# Altium PCB ISO-ASS[3]-R-RC1.PcbDoc
Units mm, origin at the board's own origin, x right, y up, seen from the top; angles counter-clockwise.
Board outline 300 x 88 mm, 2 copper layers (Top Layer, Bottom Layer); 123 components, 15 nets, 691 pads, 6 vias.
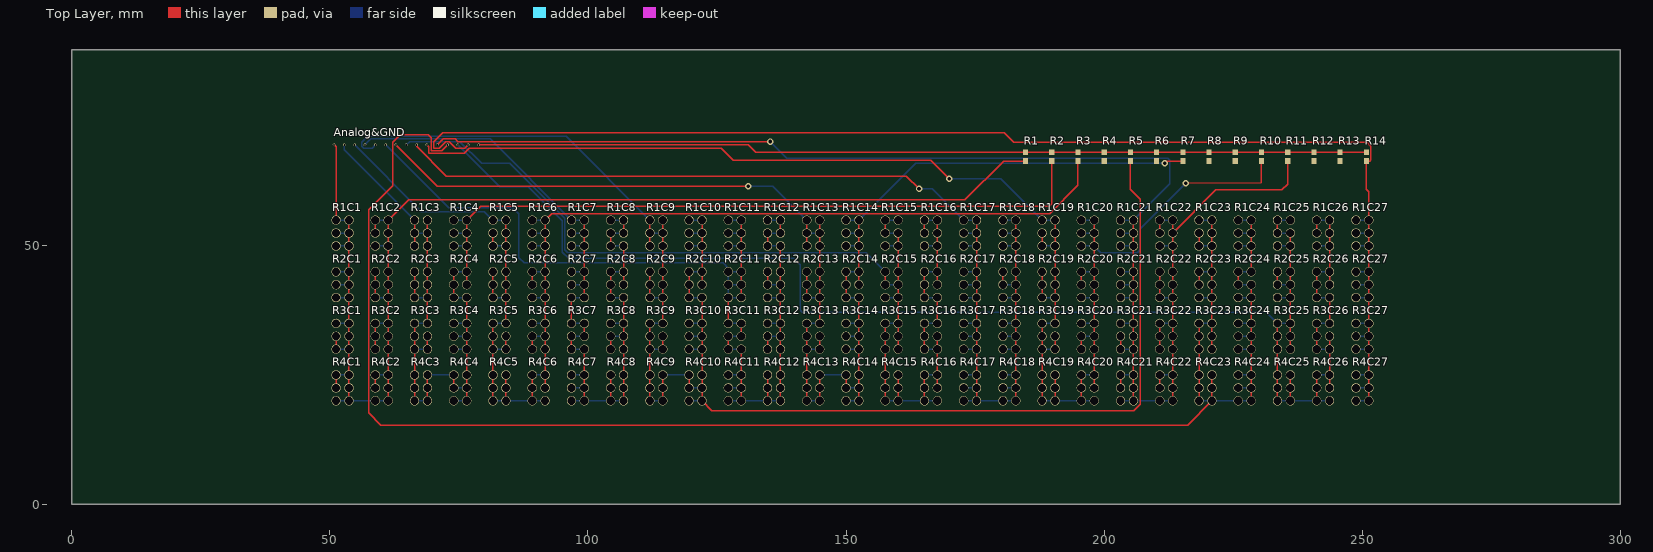
[diagram p0: Top Layer view]
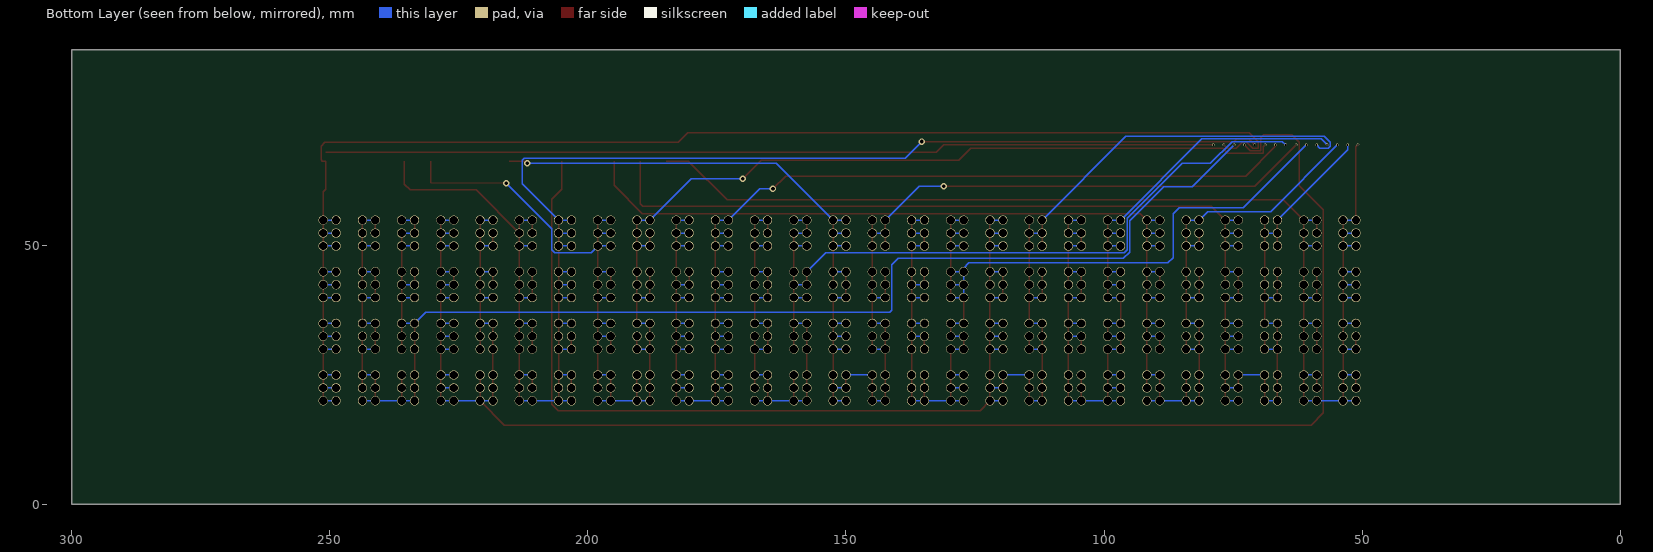
[diagram p1: Bottom Layer view, seen from below]

## Layer stack, top to bottom
Top Layer: signal copper 0.0356
Dielectric: core 0.32, FR-4, Dk 4.8
Bottom Layer: signal copper 0.0356

## Board outline
0,0 300,0 300,88 0,88 0,0

## Design rules (kind name [scope] priority, off if disabled: settings)
Clearance [All] p1: gap=0.254
PolygonConnect [All] p1: connectstyle=Relief reliefconductorwidth=0.254 reliefentries=4 polygonreliefangle="90 Angle"
RoutingVias [All] p1: holewidth=0.711 width=1.27 viastyle="Through Hole" minholewidth=0.711 minwidth=1.27 maxholewidth=0.711 maxwidth=1.27
SilkscreenOverComponentPads [All] p1: minsilkscreentomaskgap=0.254
SolderMaskExpansion [All] p1: expansion=0.102
TestPointUsage [All] p1: valid=0 allowmultiple=FALSE
Testpoint [All] p1: side=15 testpointundercomponent=TRUE minsize=1.016 maxsize=2.54 preferedsize=1.524 minholesize=0 maxholesize=1.016 preferedholesize=0.813 testpointgrid=0.025 style=1023 order=0-112345678
Width [All] p1: maxlimit=0.254 minlimit=0.254 preferedwidth=0.254
23 further rules are at their usual default settings.

## Components (designator, comment, footprint, x,y, rotation, side; value= is the part's Value field where it differs from the comment)
Analog&GND "Analog_Connector" Analog_Connector 50.8,69.596 r0 top
R1 "ERA3Y" ERA-0603 184.785,67.31 r90 top
R1C1 "BC-ASS[3]" BC-ASS[3] 51.2,50 r0 top
R1C2 "BC-ASS[3]" BC-ASS[3] 58.8,50 r0 top
R1C3 "BC-ASS[3]" BC-ASS[3] 66.4,50 r0 top
R1C4 "BC-ASS[3]" BC-ASS[3] 74,50 r0 top
R1C5 "BC-ASS[3]" BC-ASS[3] 81.6,50 r0 top
R1C6 "BC-ASS[3]" BC-ASS[3] 89.2,50 r0 top
R1C7 "BC-ASS[3]" BC-ASS[3] 96.8,50 r0 top
R1C8 "BC-ASS[3]" BC-ASS[3] 104.4,50 r0 top
R1C9 "BC-ASS[3]" BC-ASS[3] 112,50 r0 top
R1C10 "BC-ASS[3]" BC-ASS[3] 119.6,50 r0 top
R1C11 "BC-ASS[3]" BC-ASS[3] 127.2,50 r0 top
R1C12 "BC-ASS[3]" BC-ASS[3] 134.8,50 r0 top
R1C13 "BC-ASS[3]" BC-ASS[3] 142.4,50 r0 top
R1C14 "BC-ASS[3]" BC-ASS[3] 150,50 r0 top
R1C15 "BC-ASS[3]" BC-ASS[3] 157.6,50 r0 top
R1C16 "BC-ASS[3]" BC-ASS[3] 165.2,50 r0 top
R1C17 "BC-ASS[3]" BC-ASS[3] 172.8,50 r0 top
R1C18 "BC-ASS[3]" BC-ASS[3] 180.4,50 r0 top
R1C19 "BC-ASS[3]" BC-ASS[3] 188,50 r0 top
R1C20 "BC-ASS[3]" BC-ASS[3] 195.6,50 r0 top
R1C21 "BC-ASS[3]" BC-ASS[3] 203.2,50 r0 top
R1C22 "BC-ASS[3]" BC-ASS[3] 210.8,50 r0 top
R1C23 "BC-ASS[3]" BC-ASS[3] 218.4,50 r0 top
R1C24 "BC-ASS[3]" BC-ASS[3] 226,50 r0 top
R1C25 "BC-ASS[3]" BC-ASS[3] 233.6,50 r0 top
R1C26 "BC-ASS[3]" BC-ASS[3] 241.2,50 r0 top
R1C27 "BC-ASS[3]" BC-ASS[3] 248.8,50 r0 top
R2 "ERA3Y" ERA-0603 189.865,67.31 r90 top
R2C1 "BC-ASS[3]" BC-ASS[3] 51.2,40 r0 top
R2C2 "BC-ASS[3]" BC-ASS[3] 58.8,40 r0 top
R2C3 "BC-ASS[3]" BC-ASS[3] 66.4,40 r0 top
R2C4 "BC-ASS[3]" BC-ASS[3] 74,40 r0 top
R2C5 "BC-ASS[3]" BC-ASS[3] 81.6,40 r0 top
R2C6 "BC-ASS[3]" BC-ASS[3] 89.2,40 r0 top
R2C7 "BC-ASS[3]" BC-ASS[3] 96.8,40 r0 top
R2C8 "BC-ASS[3]" BC-ASS[3] 104.4,40 r0 top
R2C9 "BC-ASS[3]" BC-ASS[3] 112,40 r0 top
R2C10 "BC-ASS[3]" BC-ASS[3] 119.6,40 r0 top
R2C11 "BC-ASS[3]" BC-ASS[3] 127.2,40 r0 top
R2C12 "BC-ASS[3]" BC-ASS[3] 134.8,40 r0 top
R2C13 "BC-ASS[3]" BC-ASS[3] 142.4,40 r0 top
R2C14 "BC-ASS[3]" BC-ASS[3] 150,40 r0 top
R2C15 "BC-ASS[3]" BC-ASS[3] 157.6,40 r0 top
R2C16 "BC-ASS[3]" BC-ASS[3] 165.2,40 r0 top
R2C17 "BC-ASS[3]" BC-ASS[3] 172.8,40 r0 top
R2C18 "BC-ASS[3]" BC-ASS[3] 180.4,40 r0 top
R2C19 "BC-ASS[3]" BC-ASS[3] 188,40 r0 top
R2C20 "BC-ASS[3]" BC-ASS[3] 195.6,40 r0 top
R2C21 "BC-ASS[3]" BC-ASS[3] 203.2,40 r0 top
R2C22 "BC-ASS[3]" BC-ASS[3] 210.8,40 r0 top
R2C23 "BC-ASS[3]" BC-ASS[3] 218.4,40 r0 top
R2C24 "BC-ASS[3]" BC-ASS[3] 226,40 r0 top
R2C25 "BC-ASS[3]" BC-ASS[3] 233.6,40 r0 top
R2C26 "BC-ASS[3]" BC-ASS[3] 241.2,40 r0 top
R2C27 "BC-ASS[3]" BC-ASS[3] 248.8,40 r0 top
R3 "ERA3Y" ERA-0603 194.945,67.31 r90 top
R3C1 "BC-ASS[3]" BC-ASS[3] 51.2,30 r0 top
R3C2 "BC-ASS[3]" BC-ASS[3] 58.8,30 r0 top
R3C3 "BC-ASS[3]" BC-ASS[3] 66.4,30 r0 top
R3C4 "BC-ASS[3]" BC-ASS[3] 74,30 r0 top
R3C5 "BC-ASS[3]" BC-ASS[3] 81.6,30 r0 top
R3C6 "BC-ASS[3]" BC-ASS[3] 89.2,30 r0 top
R3C7 "BC-ASS[3]" BC-ASS[3] 96.8,30 r0 top
R3C8 "BC-ASS[3]" BC-ASS[3] 104.4,30 r0 top
R3C9 "BC-ASS[3]" BC-ASS[3] 112,30 r0 top
R3C10 "BC-ASS[3]" BC-ASS[3] 119.6,30 r0 top
R3C11 "BC-ASS[3]" BC-ASS[3] 127.2,30 r0 top
R3C12 "BC-ASS[3]" BC-ASS[3] 134.8,30 r0 top
R3C13 "BC-ASS[3]" BC-ASS[3] 142.4,30 r0 top
R3C14 "BC-ASS[3]" BC-ASS[3] 150,30 r0 top
R3C15 "BC-ASS[3]" BC-ASS[3] 157.6,30 r0 top
R3C16 "BC-ASS[3]" BC-ASS[3] 165.2,30 r0 top
R3C17 "BC-ASS[3]" BC-ASS[3] 172.8,30 r0 top
R3C18 "BC-ASS[3]" BC-ASS[3] 180.4,30 r0 top
R3C19 "BC-ASS[3]" BC-ASS[3] 188,30 r0 top
R3C20 "BC-ASS[3]" BC-ASS[3] 195.6,30 r0 top
R3C21 "BC-ASS[3]" BC-ASS[3] 203.2,30 r0 top
R3C22 "BC-ASS[3]" BC-ASS[3] 210.8,30 r0 top
R3C23 "BC-ASS[3]" BC-ASS[3] 218.4,30 r0 top
R3C24 "BC-ASS[3]" BC-ASS[3] 226,30 r0 top
R3C25 "BC-ASS[3]" BC-ASS[3] 233.6,30 r0 top
R3C26 "BC-ASS[3]" BC-ASS[3] 241.2,30 r0 top
R3C27 "BC-ASS[3]" BC-ASS[3] 248.8,30 r0 top
R4 "ERA3Y" ERA-0603 200.025,67.31 r90 top
R4C1 "BC-ASS[3]" BC-ASS[3] 51.2,20 r0 top
R4C2 "BC-ASS[3]" BC-ASS[3] 58.8,20 r0 top
R4C3 "BC-ASS[3]" BC-ASS[3] 66.4,20 r0 top
R4C4 "BC-ASS[3]" BC-ASS[3] 74,20 r0 top
R4C5 "BC-ASS[3]" BC-ASS[3] 81.6,20 r0 top
R4C6 "BC-ASS[3]" BC-ASS[3] 89.2,20 r0 top
R4C7 "BC-ASS[3]" BC-ASS[3] 96.8,20 r0 top
R4C8 "BC-ASS[3]" BC-ASS[3] 104.4,20 r0 top
R4C9 "BC-ASS[3]" BC-ASS[3] 112,20 r0 top
R4C10 "BC-ASS[3]" BC-ASS[3] 119.6,20 r0 top
R4C11 "BC-ASS[3]" BC-ASS[3] 127.2,20 r0 top
R4C12 "BC-ASS[3]" BC-ASS[3] 134.8,20 r0 top
R4C13 "BC-ASS[3]" BC-ASS[3] 142.4,20 r0 top
R4C14 "BC-ASS[3]" BC-ASS[3] 150,20 r0 top
R4C15 "BC-ASS[3]" BC-ASS[3] 157.6,20 r0 top
R4C16 "BC-ASS[3]" BC-ASS[3] 165.2,20 r0 top
R4C17 "BC-ASS[3]" BC-ASS[3] 172.8,20 r0 top
R4C18 "BC-ASS[3]" BC-ASS[3] 180.4,20 r0 top
R4C19 "BC-ASS[3]" BC-ASS[3] 188,20 r0 top
R4C20 "BC-ASS[3]" BC-ASS[3] 195.6,20 r0 top
R4C21 "BC-ASS[3]" BC-ASS[3] 203.2,20 r0 top
R4C22 "BC-ASS[3]" BC-ASS[3] 210.8,20 r0 top
R4C23 "BC-ASS[3]" BC-ASS[3] 218.4,20 r0 top
R4C24 "BC-ASS[3]" BC-ASS[3] 226,20 r0 top
R4C25 "BC-ASS[3]" BC-ASS[3] 233.6,20 r0 top
R4C26 "BC-ASS[3]" BC-ASS[3] 241.2,20 r0 top
R4C27 "BC-ASS[3]" BC-ASS[3] 248.8,20 r0 top
R5 "ERA3Y" ERA-0603 205.105,67.31 r90 top
R6 "ERA3Y" ERA-0603 210.185,67.31 r90 top
R7 "ERA3Y" ERA-0603 215.265,67.31 r90 top
R8 "ERA3Y" ERA-0603 220.345,67.31 r90 top
R9 "ERA3Y" ERA-0603 225.425,67.31 r90 top
R10 "ERA3Y" ERA-0603 230.505,67.31 r90 top
R11 "ERA3Y" ERA-0603 235.585,67.31 r90 top
R12 "ERA3Y" ERA-0603 240.665,67.31 r90 top
R13 "ERA3Y" ERA-0603 245.745,67.31 r90 top
R14 "ERA3Y" ERA-0603 250.825,67.31 r90 top

## Footprints (in the part's own frame and the unit in brackets; to place one, negate y for a bottom-side part, rotate by r counter-clockwise, add the part's x,y. Pads: shape width x height; smd on the part's side, far side on the other; paste and mask are expansions set on the pad)
Analog_Connector [mm]
  round 0.5 hole 0.4: A0(0,0) A1(2,0) A2(4,0) A3(6,0) A4(8,0) A5(10,0) A6(12,0) A7(14,0) A8(16,0) A9(18,0) A10(20,0) A11(22,0) A12(24,0) A13(26,0) GND(28,0)
BC-ASS[3] [mm] "American Standard Sign [3]"
  round 1.8 hole 1.6: 1(0,5) 2(0,2.5) 3(0,0) 4(2.5,5) 5(2.5,2.5) 6(2.5,0)
ERA-0603 [mm] "Chip Resistor; Body 1.6 x 0.8 mm (LxW typ)"
  rect 1.1x1 smd: 1(-0.85,0) 2(0.85,0)

## Part data
R1 R2 R3 R4 R5 R6 R7 R8 R9 R10 R11 R12 R13 R14: "Rectangular Thick Film Chip Resistor, 10 Ohm to 330k Ohm Range, 0.1% and 0.5% Tolerance, 0603 Size, 0.063 W"

## Via types
v1: diameter 1.27, hole 0.711, Top Layer to Bottom Layer, 6 vias

## Nets (pads, with @x,y where several pads share a name; then routed paths per layer and width w, separated by ;. In a path a pad name is that pad's centre, name@x,y a point inside that pad or via, vN(x,y) a via of type N, cw(c..) or ccw(c..) an arc to the next point about the centre after c; other vN are vias at no path point)
NetAnalog&GND_A0: Analog&GND.A0 R1.1 R1C1.1 R1C1.2 R1C1.3 R1C1.4 R1C1.5 R1C1.6 R1C2.1 R1C2.2 R1C2.3 R1C2.4 R1C2.5 R1C2.6 R2C1.1 R2C1.2 R2C1.3 R2C1.4 R2C1.5 R2C1.6 R2C2.1 R2C2.2 R2C2.3 R2C2.4 R2C2.5 R2C2.6 R3C1.1 R3C1.2 R3C1.3 R3C1.4 R3C1.5 R3C1.6 R3C2.1 R3C2.2 R3C2.3 R3C2.4 R3C2.5 R3C2.6 R4C1.1 R4C1.2 R4C1.3 R4C1.4 R4C1.5 R4C1.6 R4C2.1 R4C2.2 R4C2.3 R4C2.4 R4C2.5 R4C2.6 | length 278.1
  Top Layer w0.254: Analog&GND.A0 51.2,69.196 R1C1.1 ; R4C1.2 R4C1.1 ; R3C1.3 R3C1.2 ; R4C1.6 R4C1.5 R4C1.4 R3C1.6 R3C1.5 R3C1.4 R2C1.6 R2C1.5 R2C1.4 R1C1.6 R1C1.5 R1C1.4 ; R4C2.2 R4C2.1 ; R3C2.3 R3C2.2 R3C2.1 ; R2C2.3 R2C2.2 R2C2.1 ; R1C2.2 R1C2.1 ; R4C2.6 R4C2.5 R4C2.4 R3C2.6 R3C2.5 R3C2.4 R2C2.6 R2C2.5 R2C2.4 R1C2.6 R1C2.5 R1C2.4 65.253,58.953 173.011,58.953 180.518,66.46 R1.1
  Bottom Layer w0.254: R4C1.3 R4C1.6 R4C2.3 R4C2.6 ; R4C1.1 R4C1.4 ; R3C1.3 R3C1.6 ; R3C1.1 R3C1.4 ; R2C1.3 R2C1.6 ; R2C1.2 R2C1.5 ; R2C1.1 R2C1.4 ; R1C1.3 R1C1.6 ; R1C1.2 R1C1.5 ; R1C1.1 R1C1.4 ; R4C2.1 R4C2.4 ; R3C2.1 R3C2.4 ; R2C2.3 R2C2.6 ; R1C2.3 R1C2.6 ; R1C2.1 R1C2.4
NetAnalog&GND_A1: Analog&GND.A1 R1C3.1 R1C3.2 R1C3.3 R1C3.4 R1C3.5 R1C3.6 R1C4.1 R1C4.2 R1C4.3 R1C4.4 R1C4.5 R1C4.6 R2.1 R2C3.1 R2C3.2 R2C3.3 R2C3.4 R2C3.5 R2C3.6 R2C4.1 R2C4.2 R2C4.3 R2C4.4 R2C4.5 R2C4.6 R3C3.1 R3C3.2 R3C3.3 R3C3.4 R3C3.5 R3C3.6 R3C4.1 R3C4.2 R3C4.3 R3C4.4 R3C4.5 R3C4.6 R4C3.1 R4C3.2 R4C3.3 R4C3.4 R4C3.5 R4C3.6 R4C4.1 R4C4.2 R4C4.3 R4C4.4 R4C4.5 R4C4.6 | length 278.3
  Top Layer w0.254: R4C3.3 R4C3.2 R4C3.1 R3C3.3 R3C3.2 R3C3.1 ; R2C3.3 R2C3.2 R2C3.1 ; R1C3.3 R1C3.2 R1C3.1 ; R4C3.6 R4C3.5 R4C3.4 ; R3C3.6 R3C3.5 ; R3C3.4 R2C3.6 R2C3.5 R2C3.4 R1C3.6 R1C3.5 R1C3.4 ; R4C4.2 R4C4.1 ; R2C4.3 R2C4.2 R2C4.1 ; R4C4.6 R4C4.5 R4C4.4 R3C4.6 R3C4.5 R3C4.4 R2C4.6 ; R2C4.5 R2C4.4 R1C4.6 R1C4.5 R1C4.4 79.234,57.734 189.382,57.734 189.865,58.217 R2.1
  Bottom Layer w0.254: Analog&GND.A1 52.8,68.6 R1C3.1 ; R4C3.3 R4C3.6 ; R3C3.3 R3C3.6 ; R3C3.1 R3C3.4 ; R2C3.3 R2C3.6 ; R1C3.2 R1C3.5 ; R4C3.4 R4C4.1 ; R4C4.3 R4C4.6 ; R4C4.2 R4C4.5 ; R3C4.3 R3C4.6 ; R3C4.2 R3C4.5 ; R3C4.1 R3C4.4 ; R2C4.3 R2C4.6 ; R2C4.1 R2C4.4 ; R1C4.3 R1C4.6 ; R1C4.2 R1C4.5 ; R1C4.1 R1C4.4
NetAnalog&GND_A2: Analog&GND.A2 R1C5.1 R1C5.2 R1C5.3 R1C5.4 R1C5.5 R1C5.6 R1C6.1 R1C6.2 R1C6.3 R1C6.4 R1C6.5 R1C6.6 R2C5.1 R2C5.2 R2C5.3 R2C5.4 R2C5.5 R2C5.6 R2C6.1 R2C6.2 R2C6.3 R2C6.4 R2C6.5 R2C6.6 R3.1 R3C5.1 R3C5.2 R3C5.3 R3C5.4 R3C5.5 R3C5.6 R3C6.1 R3C6.2 R3C6.3 R3C6.4 R3C6.5 R3C6.6 R4C5.1 R4C5.2 R4C5.3 R4C5.4 R4C5.5 R4C5.6 R4C6.1 R4C6.2 R4C6.3 R4C6.4 R4C6.5 R4C6.6 | length 278.7
  Top Layer w0.254: R4C5.3 R4C5.2 R4C5.1 R3C5.3 R3C5.2 R3C5.1 ; R2C5.3 R2C5.2 R2C5.1 ; R1C5.3 R1C5.2 ; R4C5.6 R4C5.5 R4C5.4 ; R3C5.6 R3C5.5 ; R3C5.4 R2C5.6 R2C5.5 R2C5.4 R1C5.6 R1C5.5 R1C5.4 ; R4C6.3 R4C6.2 R4C6.1 ; R3C6.3 R3C6.2 ; R2C6.2 R2C6.1 ; R4C6.5 R4C6.4 R3C6.6 R3C6.5 R3C6.4 R2C6.6 R2C6.5 R2C6.4 R1C6.6 R1C6.5 R1C6.4 92.986,56.286 189.484,56.286 194.945,61.747 R3.1
  Bottom Layer w0.254: Analog&GND.A2 67.729,56.667 79.933,56.667 R1C5.1 R1C5.4 ; R4C5.3 R4C5.6 R4C6.3 R4C6.6 ; R3C5.3 R3C5.6 ; R3C5.1 R3C5.4 ; R2C5.3 R2C5.6 ; R1C5.3 R1C5.6 ; R4C6.1 R4C6.4 ; R3C6.2 R3C6.5 ; R3C6.1 R3C6.4 ; R2C6.3 R2C6.6 ; R2C6.1 R2C6.4 ; R1C6.3 R1C6.6 ; R1C6.2 R1C6.5 ; R1C6.1 R1C6.4
NetAnalog&GND_A3: Analog&GND.A3 R1C7.1 R1C7.2 R1C7.3 R1C7.4 R1C7.5 R1C7.6 R1C8.1 R1C8.2 R1C8.3 R1C8.4 R1C8.5 R1C8.6 R2C7.1 R2C7.2 R2C7.3 R2C7.4 R2C7.5 R2C7.6 R2C8.1 R2C8.2 R2C8.3 R2C8.4 R2C8.5 R2C8.6 R3C7.1 R3C7.2 R3C7.3 R3C7.4 R3C7.5 R3C7.6 R3C8.1 R3C8.2 R3C8.3 R3C8.4 R3C8.5 R3C8.6 R4C7.1 R4C7.2 R4C7.3 R4C7.4 R4C7.5 R4C7.6 R4C8.1 R4C8.2 R4C8.3 R4C8.4 R4C8.5 R4C8.6 | length 182.1
  Top Layer w0.254: R3C7.3 R3C7.2 ; R3C7.1 R2C7.3 ; R4C7.6 R4C7.5 R4C7.4 R3C7.6 ; R3C7.5 R3C7.4 ; R2C7.6 R2C7.5 R2C7.4 R1C7.6 R1C7.5 R1C7.4 ; R4C8.3 R4C8.2 R4C8.1 ; R3C8.3 R3C8.2 ; R2C8.3 R2C8.2 R2C8.1 ; R1C8.3 R1C8.2 ; R4C8.6 R4C8.5 R4C8.4 R3C8.6 R3C8.5 R3C8.4 R2C8.6 ; R2C8.5 R2C8.4 R1C8.6 ; R1C8.5 R1C8.4
  Bottom Layer w0.254: Analog&GND.A3 57.939,70.735 81.065,70.735 R1C7.1 R1C7.4 ; R4C7.3 R4C7.6 R4C8.3 R4C8.6 ; R4C7.2 R4C7.5 ; R4C7.1 R4C7.4 ; R3C7.3 R3C7.6 ; R3C7.2 R3C7.5 ; R3C7.1 R3C7.4 ; R2C7.3 R2C7.6 ; R2C7.2 R2C7.5 ; R2C7.1 R2C7.4 ; R1C7.3 R1C7.6 ; R1C7.2 R1C7.5 ; R3C8.2 R3C8.5 ; R3C8.1 R3C8.4 ; R2C8.3 R2C8.6 ; R2C8.1 R2C8.4 ; R1C8.3 R1C8.6 ; R1C8.2 R1C8.5 ; R1C8.1 R1C8.4
NetAnalog&GND_A4: Analog&GND.A4 R1C9.1 R1C9.2 R1C9.3 R1C9.4 R1C9.5 R1C9.6 R1C10.1 R1C10.2 R1C10.3 R1C10.4 R1C10.5 R1C10.6 R2C9.1 R2C9.2 R2C9.3 R2C9.4 R2C9.5 R2C9.6 R2C10.1 R2C10.2 R2C10.3 R2C10.4 R2C10.5 R2C10.6 R3C9.1 R3C9.2 R3C9.3 R3C9.4 R3C9.5 R3C9.6 R3C10.1 R3C10.2 R3C10.3 R3C10.4 R3C10.5 R3C10.6 R4C9.1 R4C9.2 R4C9.3 R4C9.4 R4C9.5 R4C9.6 R4C10.1 R4C10.2 R4C10.3 R4C10.4 R4C10.5 R4C10.6 R5.1 | length 336.1
  Top Layer w0.254: R4C9.3 R4C9.2 R4C9.1 R3C9.3 R3C9.2 R3C9.1 ; R2C9.3 R2C9.2 R2C9.1 ; R1C9.3 R1C9.2 R1C9.1 ; R4C9.6 R4C9.5 R4C9.4 ; R3C9.6 R3C9.5 ; R3C9.4 R2C9.6 R2C9.5 R2C9.4 R1C9.6 R1C9.5 R1C9.4 ; R4C10.2 R4C10.1 ; R2C10.3 R2C10.2 R2C10.1 ; R2C10.6 R3C10.4 R3C10.5 R3C10.6 R4C10.4 R4C10.5 R4C10.6 124.015,18.085 205.765,18.085 206.985,19.304 206.985,59.08 205.105,60.96 R5.1 ; R2C10.5 R2C10.4 R1C10.6 R1C10.5 R1C10.4
  Bottom Layer w0.254: Analog&GND.A4 58.165,68.961 56.54,68.961 56.159,69.342 56.159,70.104 57.298,71.243 95.757,71.243 R1C9.1 ; R4C9.3 R4C9.6 ; R3C9.3 R3C9.6 ; R3C9.1 R3C9.4 ; R2C9.3 R2C9.6 ; R1C9.2 R1C9.5 ; R4C9.4 R4C10.1 ; R4C10.3 R4C10.6 ; R4C10.2 R4C10.5 ; R3C10.3 R3C10.6 ; R3C10.2 R3C10.5 ; R3C10.1 R3C10.4 ; R2C10.3 R2C10.6 ; R2C10.1 R2C10.4 ; R1C10.3 R1C10.6 ; R1C10.2 R1C10.5 ; R1C10.1 R1C10.4
NetAnalog&GND_A5: Analog&GND.A5 R1C11.1 R1C11.2 R1C11.3 R1C11.4 R1C11.5 R1C11.6 R1C12.1 R1C12.2 R1C12.3 R1C12.4 R1C12.5 R1C12.6 R2C11.1 R2C11.2 R2C11.3 R2C11.4 R2C11.5 R2C11.6 R2C12.1 R2C12.2 R2C12.3 R2C12.4 R2C12.5 R2C12.6 R3C11.1 R3C11.2 R3C11.3 R3C11.4 R3C11.5 R3C11.6 R3C12.1 R3C12.2 R3C12.3 R3C12.4 R3C12.5 R3C12.6 R4C11.1 R4C11.2 R4C11.3 R4C11.4 R4C11.5 R4C11.6 R4C12.1 R4C12.2 R4C12.3 R4C12.4 R4C12.5 R4C12.6 | length 222.1
  Top Layer w0.254: R3C11.3 R3C11.2 ; R3C11.1 R2C11.3 ; R4C11.6 R4C11.5 R4C11.4 R3C11.6 ; R3C11.5 R3C11.4 ; R2C11.6 R2C11.5 R2C11.4 R1C11.6 R1C11.5 R1C11.4 ; R4C12.3 R4C12.2 R4C12.1 ; R3C12.3 R3C12.2 ; R2C12.2 R2C12.1 ; R1C12.3 R1C12.2 ; R4C12.6 R4C12.5 R4C12.4 R3C12.6 R3C12.5 R3C12.4 R2C12.6 R2C12.5 R2C12.4 R1C12.6 ; R1C12.5 R1C12.4
  Bottom Layer w0.254: Analog&GND.A5 72.992,57.404 85.42,57.404 86.614,56.21 86.614,47.752 87.63,46.736 126.184,46.736 127.2,45.72 R2C11.1 ; R4C11.3 R4C11.6 R4C12.3 R4C12.6 ; R4C11.2 R4C11.5 ; R4C11.1 R4C11.4 ; R3C11.3 R3C11.6 ; R3C11.2 R3C11.5 ; R3C11.1 R3C11.4 ; R1C11.3 R1C11.6 ; R1C11.2 R1C11.5 ; R1C11.1 R1C11.4 ; R2C11.6 R2C11.3 R2C11.2 ; R2C11.5 R2C11.2 ; R2C11.4 R2C11.1 ; R3C12.2 R3C12.5 ; R3C12.1 R3C12.4 ; R2C12.3 R2C12.6 ; R2C12.2 R2C12.5 ; R1C12.3 R1C12.6 ; R1C12.2 R1C12.5 ; R1C12.1 R1C12.4 ; R2C11.2 R2C11.1
NetAnalog&GND_A6: Analog&GND.A6 R1C13.1 R1C13.2 R1C13.3 R1C13.4 R1C13.5 R1C13.6 R1C14.1 R1C14.2 R1C14.3 R1C14.4 R1C14.5 R1C14.6 R2C13.1 R2C13.2 R2C13.3 R2C13.4 R2C13.5 R2C13.6 R2C14.1 R2C14.2 R2C14.3 R2C14.4 R2C14.5 R2C14.6 R3C13.1 R3C13.2 R3C13.3 R3C13.4 R3C13.5 R3C13.6 R3C14.1 R3C14.2 R3C14.3 R3C14.4 R3C14.5 R3C14.6 R4C13.1 R4C13.2 R4C13.3 R4C13.4 R4C13.5 R4C13.6 R4C14.1 R4C14.2 R4C14.3 R4C14.4 R4C14.5 R4C14.6 R7.1 | length 288.3
  Top Layer w0.254: Analog&GND.A6 70.826,61.57 v1(131.089,61.57) ; R4C13.3 R4C13.2 R4C13.1 R3C13.3 R3C13.2 R3C13.1 ; R2C13.3 R2C13.2 R2C13.1 ; R1C13.3 R1C13.2 R1C13.1 ; R4C13.6 R4C13.5 R4C13.4 ; R3C13.6 R3C13.5 ; R3C13.4 R2C13.6 R2C13.5 R2C13.4 R1C13.6 R1C13.5 R1C13.4 ; R4C14.2 R4C14.1 ; R2C14.3 R2C14.2 R2C14.1 ; R4C14.6 R4C14.5 R4C14.4 R3C14.6 R3C14.5 R3C14.4 R2C14.6 ; R2C14.5 R2C14.4 R1C14.6 R1C14.5 R1C14.4 ; v1(211.734,66.015) 212.18,66.46 R7.1
  Bottom Layer w0.254: v1(131.089,61.57) 135.83,61.57 R1C13.1 ; R4C13.3 R4C13.6 ; R3C13.3 R3C13.6 ; R3C13.1 R3C13.4 ; R2C13.3 R2C13.6 ; R1C13.2 R1C13.5 ; R4C13.4 R4C14.1 ; R4C14.3 R4C14.6 ; R4C14.2 R4C14.5 ; R3C14.3 R3C14.6 ; R3C14.2 R3C14.5 ; R3C14.1 R3C14.4 ; R2C14.3 R2C14.6 ; R2C14.1 R2C14.4 ; R1C14.3 R1C14.6 ; R1C14.2 R1C14.5 ; R1C14.1 R1C14.4 163.515,66.015 v1(211.734,66.015)
NetAnalog&GND_A7: Analog&GND.A7 R1C15.1 R1C15.2 R1C15.3 R1C15.4 R1C15.5 R1C15.6 R1C16.1 R1C16.2 R1C16.3 R1C16.4 R1C16.5 R1C16.6 R2C15.1 R2C15.2 R2C15.3 R2C15.4 R2C15.5 R2C15.6 R2C16.1 R2C16.2 R2C16.3 R2C16.4 R2C16.5 R2C16.6 R3C15.1 R3C15.2 R3C15.3 R3C15.4 R3C15.5 R3C15.6 R3C16.1 R3C16.2 R3C16.3 R3C16.4 R3C16.5 R3C16.6 R4C15.1 R4C15.2 R4C15.3 R4C15.4 R4C15.5 R4C15.6 R4C16.1 R4C16.2 R4C16.3 R4C16.4 R4C16.5 R4C16.6 | length 242.2
  Top Layer w0.254: R4C15.3 R4C15.2 R4C15.1 R3C15.3 R3C15.2 R3C15.1 ; R2C15.2 R2C15.1 ; R1C15.2 R1C15.1 ; R4C15.6 R4C15.5 R4C15.4 ; R3C15.6 R3C15.5 R3C15.4 R2C15.6 R2C15.5 R2C15.4 R1C15.6 R1C15.5 ; R4C16.3 R4C16.2 R4C16.1 ; R3C16.3 R3C16.2 R3C16.1 ; R2C16.3 R2C16.2 R2C16.1 ; R1C16.2 R1C16.1 ; R4C16.5 R4C16.4 R3C16.6 R3C16.5 ; R3C16.4 R2C16.6 ; R2C16.5 R2C16.4 R1C16.6 R1C16.5 R1C16.4
  Bottom Layer w0.254: Analog&GND.A7 65.431,70.227 75.137,70.227 79.375,65.989 84.887,65.989 95.519,55.357 95.519,49.276 96.078,48.717 153.883,48.717 R2C15.1 ; R4C15.3 R4C15.6 R4C16.3 R4C16.6 ; R3C15.1 R3C15.4 ; R2C15.3 R2C15.6 ; R2C15.2 R2C15.5 ; R1C15.3 R1C15.6 ; R1C15.2 R1C15.5 ; R1C15.1 R1C15.4 ; R4C16.1 R4C16.4 ; R3C16.3 R3C16.6 ; R3C16.1 R3C16.4 ; R2C16.3 R2C16.6 ; R2C16.1 R2C16.4 ; R1C16.3 R1C16.6 ; R1C16.1 R1C16.4
NetAnalog&GND_A8: Analog&GND.A8 R1C17.1 R1C17.2 R1C17.3 R1C17.4 R1C17.5 R1C17.6 R1C18.1 R1C18.2 R1C18.3 R1C18.4 R1C18.5 R1C18.6 R2C17.1 R2C17.2 R2C17.3 R2C17.4 R2C17.5 R2C17.6 R2C18.1 R2C18.2 R2C18.3 R2C18.4 R2C18.5 R2C18.6 R3C17.1 R3C17.2 R3C17.3 R3C17.4 R3C17.5 R3C17.6 R3C18.1 R3C18.2 R3C18.3 R3C18.4 R3C18.5 R3C18.6 R4C17.1 R4C17.2 R4C17.3 R4C17.4 R4C17.5 R4C17.6 R4C18.1 R4C18.2 R4C18.3 R4C18.4 R4C18.5 R4C18.6 | length 247.3
  Top Layer w0.254: Analog&GND.A8 66.8,69.286 72.561,63.525 161.696,63.525 v1(164.16,61.062) ; R4C17.6 R4C17.5 R4C17.4 R3C17.6 R3C17.5 R3C17.4 R2C17.6 R2C17.5 R2C17.4 R1C17.6 R1C17.5 R1C17.4 ; R2C18.2 R2C18.1 ; R4C18.6 R4C18.5 R4C18.4 R3C18.6 R3C18.5 R3C18.4 R2C18.6 R2C18.5 R2C18.4 R1C18.6 R1C18.5 R1C18.4
  Bottom Layer w0.254: v1(164.16,61.062) 166.738,61.062 R1C17.1 R1C17.4 ; R4C17.3 R4C17.6 R4C18.3 R4C18.6 ; R4C17.2 R4C17.5 ; R4C17.1 R4C17.4 ; R3C17.3 R3C17.6 ; R3C17.2 R3C17.5 ; R3C17.1 R3C17.4 ; R2C17.3 R2C17.6 ; R2C17.2 R2C17.5 ; R2C17.1 R2C17.4 ; R1C17.3 R1C17.6 ; R1C17.2 R1C17.5 ; R4C18.2 R4C18.5 ; R4C18.1 R4C18.4 ; R3C18.3 R3C18.6 ; R3C18.2 R3C18.5 ; R3C18.1 R3C18.4 ; R2C18.3 R2C18.6 ; R2C18.2 R2C18.5 ; R1C18.3 R1C18.6 ; R1C18.2 R1C18.5 ; R1C18.1 R1C18.4
NetAnalog&GND_A9: Analog&GND.A9 R1C19.1 R1C19.2 R1C19.3 R1C19.4 R1C19.5 R1C19.6 R1C20.1 R1C20.2 R1C20.3 R1C20.4 R1C20.5 R1C20.6 R2C19.1 R2C19.2 R2C19.3 R2C19.4 R2C19.5 R2C19.6 R2C20.1 R2C20.2 R2C20.3 R2C20.4 R2C20.5 R2C20.6 R3C19.1 R3C19.2 R3C19.3 R3C19.4 R3C19.5 R3C19.6 R3C20.1 R3C20.2 R3C20.3 R3C20.4 R3C20.5 R3C20.6 R4C19.1 R4C19.2 R4C19.3 R4C19.4 R4C19.5 R4C19.6 R4C20.1 R4C20.2 R4C20.3 R4C20.4 R4C20.5 R4C20.6 R10.1 | length 307
  Top Layer w0.254: Analog&GND.A9 69.153,69.243 69.153,67.949 75.989,67.949 77.001,68.961 125.806,68.961 128.143,66.624 166.421,66.624 v1(170.002,63.043) ; R4C19.3 R4C19.2 R4C19.1 R3C19.3 R3C19.2 R3C19.1 ; R2C19.3 R2C19.2 R2C19.1 ; R1C19.3 R1C19.2 ; R4C19.6 R4C19.5 R4C19.4 ; R3C19.6 R3C19.5 ; R3C19.4 R2C19.6 R2C19.5 R2C19.4 R1C19.6 R1C19.5 R1C19.4 ; R4C20.3 R4C20.2 R4C20.1 ; R3C20.3 R3C20.2 ; R2C20.2 R2C20.1 ; R4C20.5 R4C20.4 R3C20.6 R3C20.5 R3C20.4 R2C20.6 R2C20.5 R2C20.4 R1C20.6 R1C20.5 R1C20.4 ; v1(215.849,62.154) 230.505,62.23 R10.1
  Bottom Layer w0.254: v1(170.002,63.043) 179.957,63.043 R1C19.1 R1C19.4 ; R4C19.3 R4C19.6 R4C20.3 R4C20.6 ; R3C19.3 R3C19.6 ; R3C19.1 R3C19.4 ; R2C19.3 R2C19.6 ; R1C19.3 R1C19.6 ; R4C20.1 R4C20.4 ; R3C20.2 R3C20.5 ; R3C20.1 R3C20.4 ; R2C20.3 R2C20.6 ; R2C20.1 R2C20.4 ; R1C20.3 R1C20.6 199.383,48.717 206.426,48.717 206.985,49.276 206.985,53.289 v1(215.849,62.154) ; R1C20.2 R1C20.5 ; R1C20.1 R1C20.4
NetAnalog&GND_A10: Analog&GND.A10 R1C21.1 R1C21.2 R1C21.3 R1C21.4 R1C21.5 R1C21.6 R1C22.1 R1C22.2 R1C22.3 R1C22.4 R1C22.5 R1C22.6 R2C21.1 R2C21.2 R2C21.3 R2C21.4 R2C21.5 R2C21.6 R2C22.1 R2C22.2 R2C22.3 R2C22.4 R2C22.5 R2C22.6 R3C21.1 R3C21.2 R3C21.3 R3C21.4 R3C21.5 R3C21.6 R3C22.1 R3C22.2 R3C22.3 R3C22.4 R3C22.5 R3C22.6 R4C21.1 R4C21.2 R4C21.3 R4C21.4 R4C21.5 R4C21.6 R4C22.1 R4C22.2 R4C22.3 R4C22.4 R4C22.5 R4C22.6 R11.1 | length 324.5
  Top Layer w0.254: Analog&GND.A10 71.939,70.735 74.308,70.735 74.812,70.231 v1(135.331,70.231) ; R4C21.2 R4C21.1 ; R3C21.3 R3C21.2 ; R4C21.6 R4C21.5 R4C21.4 R3C21.6 R3C21.5 R3C21.4 R2C21.6 R2C21.5 R2C21.4 R1C21.6 R1C21.5 R1C21.4 ; R4C22.2 R4C22.1 ; R3C22.3 R3C22.2 R3C22.1 ; R2C22.3 R2C22.2 R2C22.1 ; R1C22.2 R1C22.1 ; R4C22.6 R4C22.5 R4C22.4 R3C22.6 R3C22.5 R3C22.4 R2C22.6 R2C22.5 R2C22.4 R1C22.6 R1C22.5 ; R1C22.4 R1C22.5 ; R11.1 235.585,61.976 234.467,60.858 221.658,60.858 R1C22.5
  Bottom Layer w0.254: v1(135.331,70.231) 138.532,67.031 212.344,67.031 212.75,66.624 212.75,62.05 R1C21.4 R1C21.1 ; R4C21.3 R4C21.6 R4C22.3 R4C22.6 ; R4C21.1 R4C21.4 ; R3C21.3 R3C21.6 ; R3C21.1 R3C21.4 ; R2C21.3 R2C21.6 ; R2C21.2 R2C21.5 ; R2C21.1 R2C21.4 ; R1C21.3 R1C21.6 ; R1C21.2 R1C21.5 ; R4C22.1 R4C22.4 ; R3C22.1 R3C22.4 ; R2C22.3 R2C22.6 ; R1C22.3 R1C22.6 ; R1C22.1 R1C22.4
NetAnalog&GND_A11: Analog&GND.A11 R1C23.1 R1C23.2 R1C23.3 R1C23.4 R1C23.5 R1C23.6 R1C24.1 R1C24.2 R1C24.3 R1C24.4 R1C24.5 R1C24.6 R2C23.1 R2C23.2 R2C23.3 R2C23.4 R2C23.5 R2C23.6 R2C24.1 R2C24.2 R2C24.3 R2C24.4 R2C24.5 R2C24.6 R3C23.1 R3C23.2 R3C23.3 R3C23.4 R3C23.5 R3C23.6 R3C24.1 R3C24.2 R3C24.3 R3C24.4 R3C24.5 R3C24.6 R4C23.1 R4C23.2 R4C23.3 R4C23.4 R4C23.5 R4C23.6 R4C24.1 R4C24.2 R4C24.3 R4C24.4 R4C24.5 R4C24.6 | length 370.3
  Top Layer w0.254: Analog&GND.A11 71.661,68.457 69.661,68.457 69.661,71.004 69.088,71.577 63.627,71.577 62.154,70.104 62.154,61.697 57.506,57.048 57.506,17.678 59.893,15.291 216.191,15.291 R4C23.6 R4C23.5 R4C23.4 ; R4C23.3 R4C23.2 R4C23.1 R3C23.3 R3C23.2 R3C23.1 ; R2C23.2 R2C23.1 ; R1C23.3 R1C23.2 ; R3C23.6 R3C23.5 R3C23.4 R2C23.6 R2C23.5 R2C23.4 R1C23.6 R1C23.5 R1C23.4 ; R2C24.2 R2C24.1 ; R4C24.6 R4C24.5 R4C24.4 R3C24.6 R3C24.5 R3C24.4 R2C24.6 R2C24.5 ; R2C24.4 R1C24.6 R1C24.5 R1C24.4
  Bottom Layer w0.254: R4C23.3 R4C23.6 R4C24.3 R4C24.6 ; R3C23.1 R3C23.4 ; R2C23.3 R2C23.6 ; R2C23.1 R2C23.4 ; R1C23.3 R1C23.6 ; R1C23.1 R1C23.4 ; R4C24.2 R4C24.5 ; R4C24.1 R4C24.4 ; R3C24.3 R3C24.6 ; R3C24.2 R3C24.5 ; R3C24.1 R3C24.4 ; R2C24.3 R2C24.6 ; R2C24.2 R2C24.5 ; R2C24.1 R2C24.4 ; R1C24.3 R1C24.6 ; R1C24.2 R1C24.5 ; R1C24.1 R1C24.4
NetAnalog&GND_A12: Analog&GND.A12 R1C25.1 R1C25.2 R1C25.3 R1C25.4 R1C25.5 R1C25.6 R1C26.1 R1C26.2 R1C26.3 R1C26.4 R1C26.5 R1C26.6 R2C25.1 R2C25.2 R2C25.3 R2C25.4 R2C25.5 R2C25.6 R2C26.1 R2C26.2 R2C26.3 R2C26.4 R2C26.5 R2C26.6 R3C25.1 R3C25.2 R3C25.3 R3C25.4 R3C25.5 R3C25.6 R3C26.1 R3C26.2 R3C26.3 R3C26.4 R3C26.5 R3C26.6 R4C25.1 R4C25.2 R4C25.3 R4C25.4 R4C25.5 R4C25.6 R4C26.1 R4C26.2 R4C26.3 R4C26.4 R4C26.5 R4C26.6 | length 316.9
  Top Layer w0.254: R4C25.3 R4C25.2 R4C25.1 R3C25.3 R3C25.2 R3C25.1 ; R2C25.2 R2C25.1 ; R1C25.2 R1C25.1 ; R4C25.6 R4C25.5 R4C25.4 ; R3C25.6 R3C25.5 R3C25.4 R2C25.6 R2C25.5 R2C25.4 R1C25.6 R1C25.5 ; R4C26.3 R4C26.2 R4C26.1 ; R3C26.3 R3C26.2 R3C26.1 ; R2C26.3 R2C26.2 R2C26.1 ; R1C26.2 R1C26.1 ; R4C26.5 R4C26.4 R3C26.6 R3C26.5 ; R3C26.4 R2C26.6 ; R2C26.5 R2C26.4 R1C26.6 R1C26.5 R1C26.4
  Bottom Layer w0.254: Analog&GND.A12 82.877,61.519 88.392,61.519 95.011,54.9 95.011,48.829 96.266,47.574 139.852,47.574 141.097,46.33 141.097,37.516 141.478,37.135 231.465,37.135 R3C25.1 R3C25.4 ; R4C25.3 R4C25.6 R4C26.3 R4C26.6 ; R2C25.3 R2C25.6 ; R2C25.2 R2C25.5 ; R1C25.3 R1C25.6 ; R1C25.2 R1C25.5 ; R1C25.1 R1C25.4 ; R4C26.1 R4C26.4 ; R3C26.3 R3C26.6 ; R3C26.1 R3C26.4 ; R2C26.3 R2C26.6 ; R2C26.1 R2C26.4 ; R1C26.3 R1C26.6 ; R1C26.1 R1C26.4
NetAnalog&GND_A13: Analog&GND.A13 R1C27.1 R1C27.2 R1C27.3 R1C27.4 R1C27.5 R1C27.6 R2C27.1 R2C27.2 R2C27.3 R2C27.4 R2C27.5 R2C27.6 R3C27.1 R3C27.2 R3C27.3 R3C27.4 R3C27.5 R3C27.6 R4C27.1 R4C27.2 R4C27.3 R4C27.4 R4C27.5 R4C27.6 R14.1 | length 272.8
  Top Layer w0.254: Analog&GND.A13 76.169,68.965 74.414,68.965 73.152,70.227 72.437,70.227 71.175,68.965 70.169,68.965 70.169,70.227 71.849,71.907 180.696,71.907 182.524,70.079 250.952,70.079 251.714,69.317 251.714,66.714 251.46,66.46 R14.1 250.825,60.952 251.3,60.477 R1C27.4 R1C27.5 R1C27.6 R2C27.4 R2C27.5 R2C27.6 R3C27.4 R3C27.5 R3C27.6 R4C27.4 R4C27.5 R4C27.6
  Bottom Layer w0.254: R4C27.3 R4C27.6 ; R4C27.2 R4C27.5 ; R4C27.1 R4C27.4 ; R3C27.3 R3C27.6 ; R3C27.2 R3C27.5 ; R3C27.1 R3C27.4 ; R2C27.3 R2C27.6 ; R2C27.2 R2C27.5 ; R2C27.1 R2C27.4 ; R1C27.3 R1C27.6 ; R1C27.2 R1C27.5 ; R1C27.1 R1C27.4
NetAnalog&GND_GND: Analog&GND.GND R1.2 R2.2 R3.2 R4.2 R5.2 R6.2 R7.2 R8.2 R9.2 R10.2 R11.2 R12.2 R13.2 R14.2 | length 172.6
  Top Layer w0.254: Analog&GND.GND 131.064,69.596 132.5,68.16 R1.2 R2.2 R3.2 R4.2 R5.2 R6.2 R7.2 R8.2 R9.2 R10.2 R11.2 R12.2 R13.2 R14.2
pads on no net: R4.1 R6.1 R8.1 R9.1 R12.1 R13.1